# Altium PCB Motor_Driver_Model_D203.PcbDoc (part 1 of 4)
Units mm, origin at the board's own origin, x right, y up, seen from the top; angles counter-clockwise.
Board outline 50 x 35 mm, 4 copper layers (1-SIG-TOP, 2-SIG-GND, 3-SIG-PWR, 4-SIG-BOT), stack 0.96 mm thick; 141 components, 74 nets, 356 pads, 1049 vias.
Unrouted connection lines stored in the file: 1.
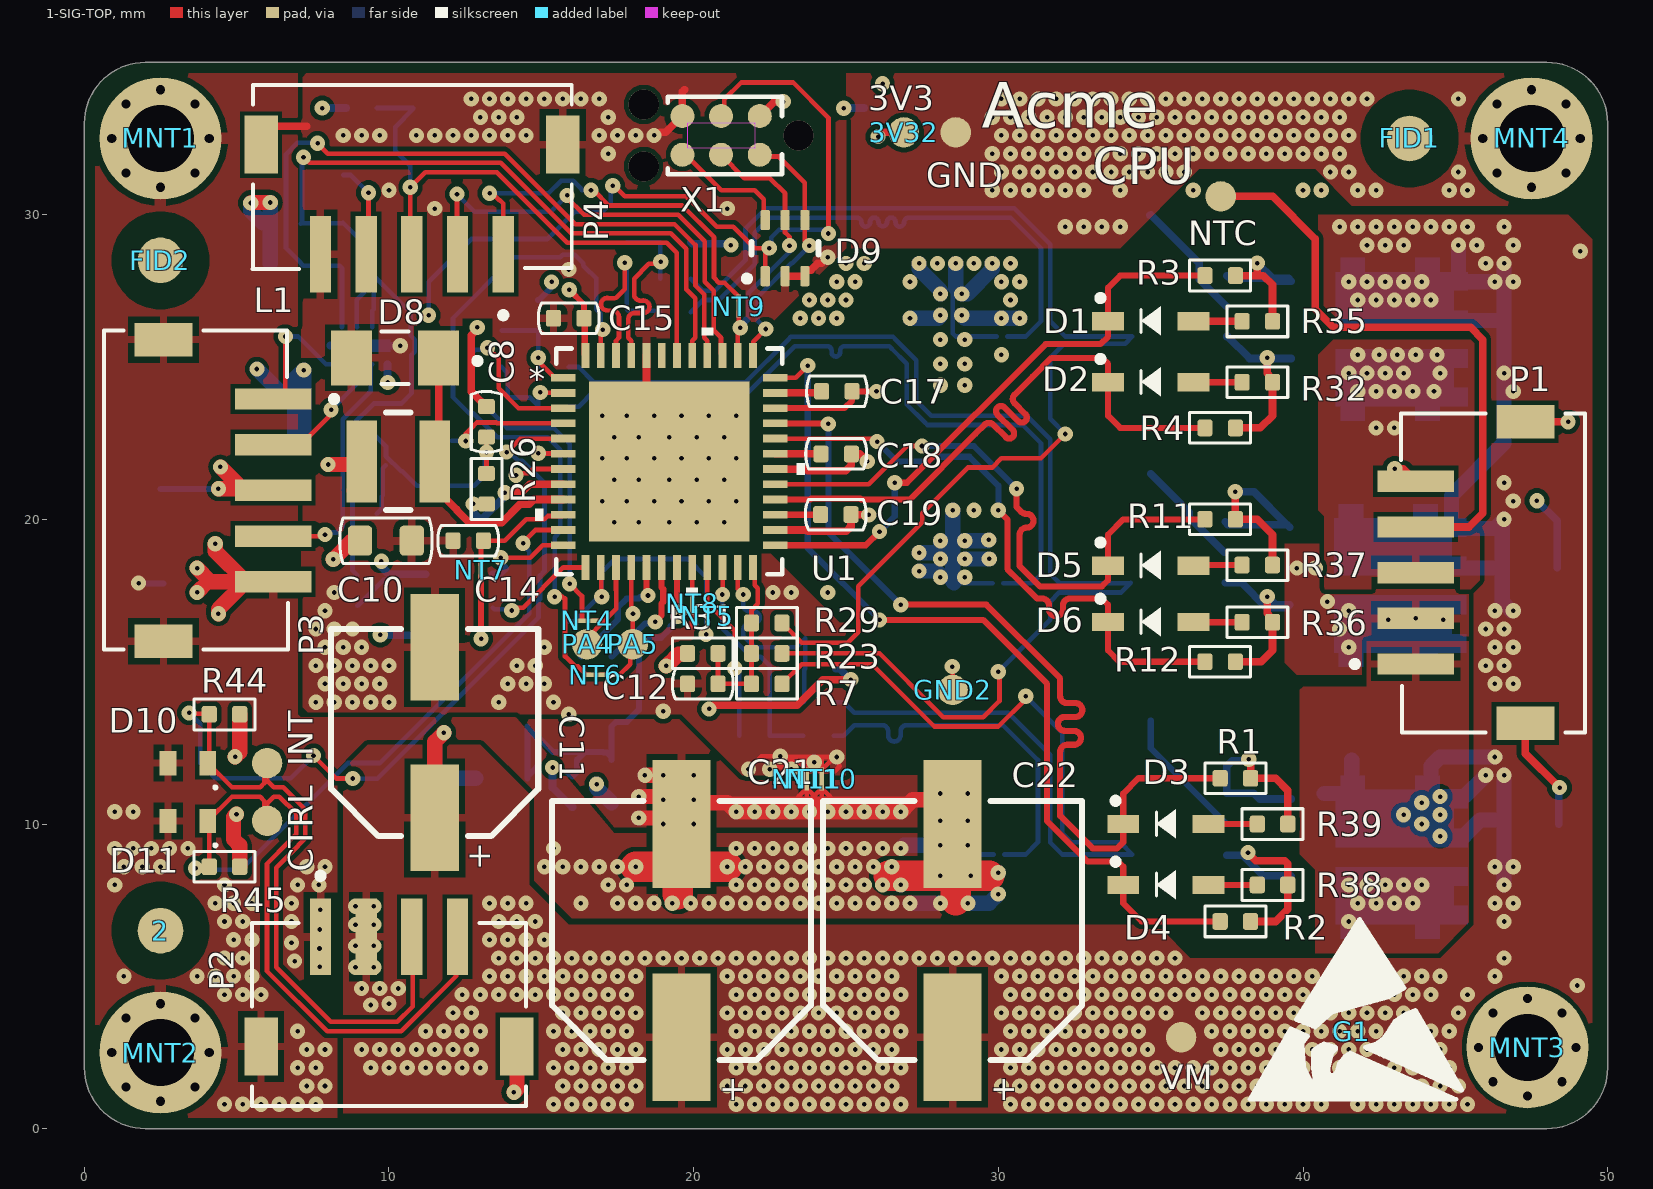
[diagram p0: 1-SIG-TOP view]
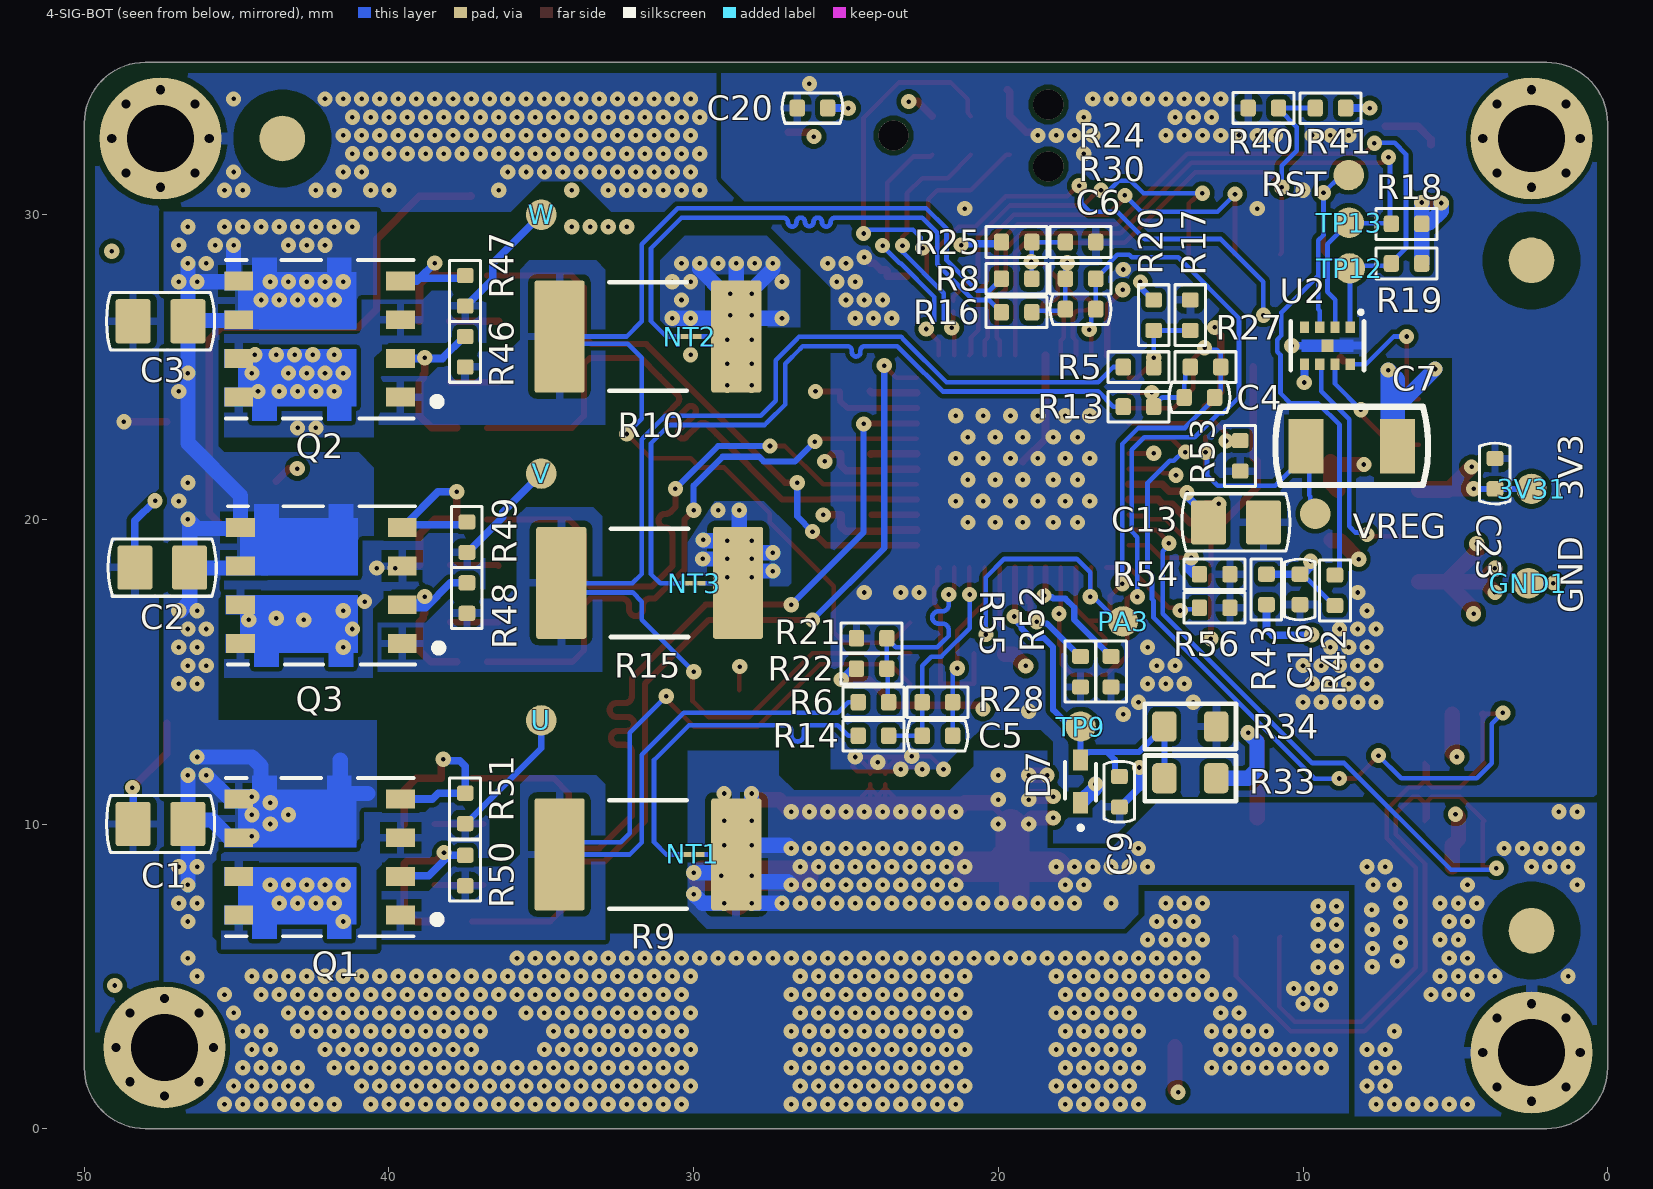
[diagram p1: 4-SIG-BOT view, seen from below]
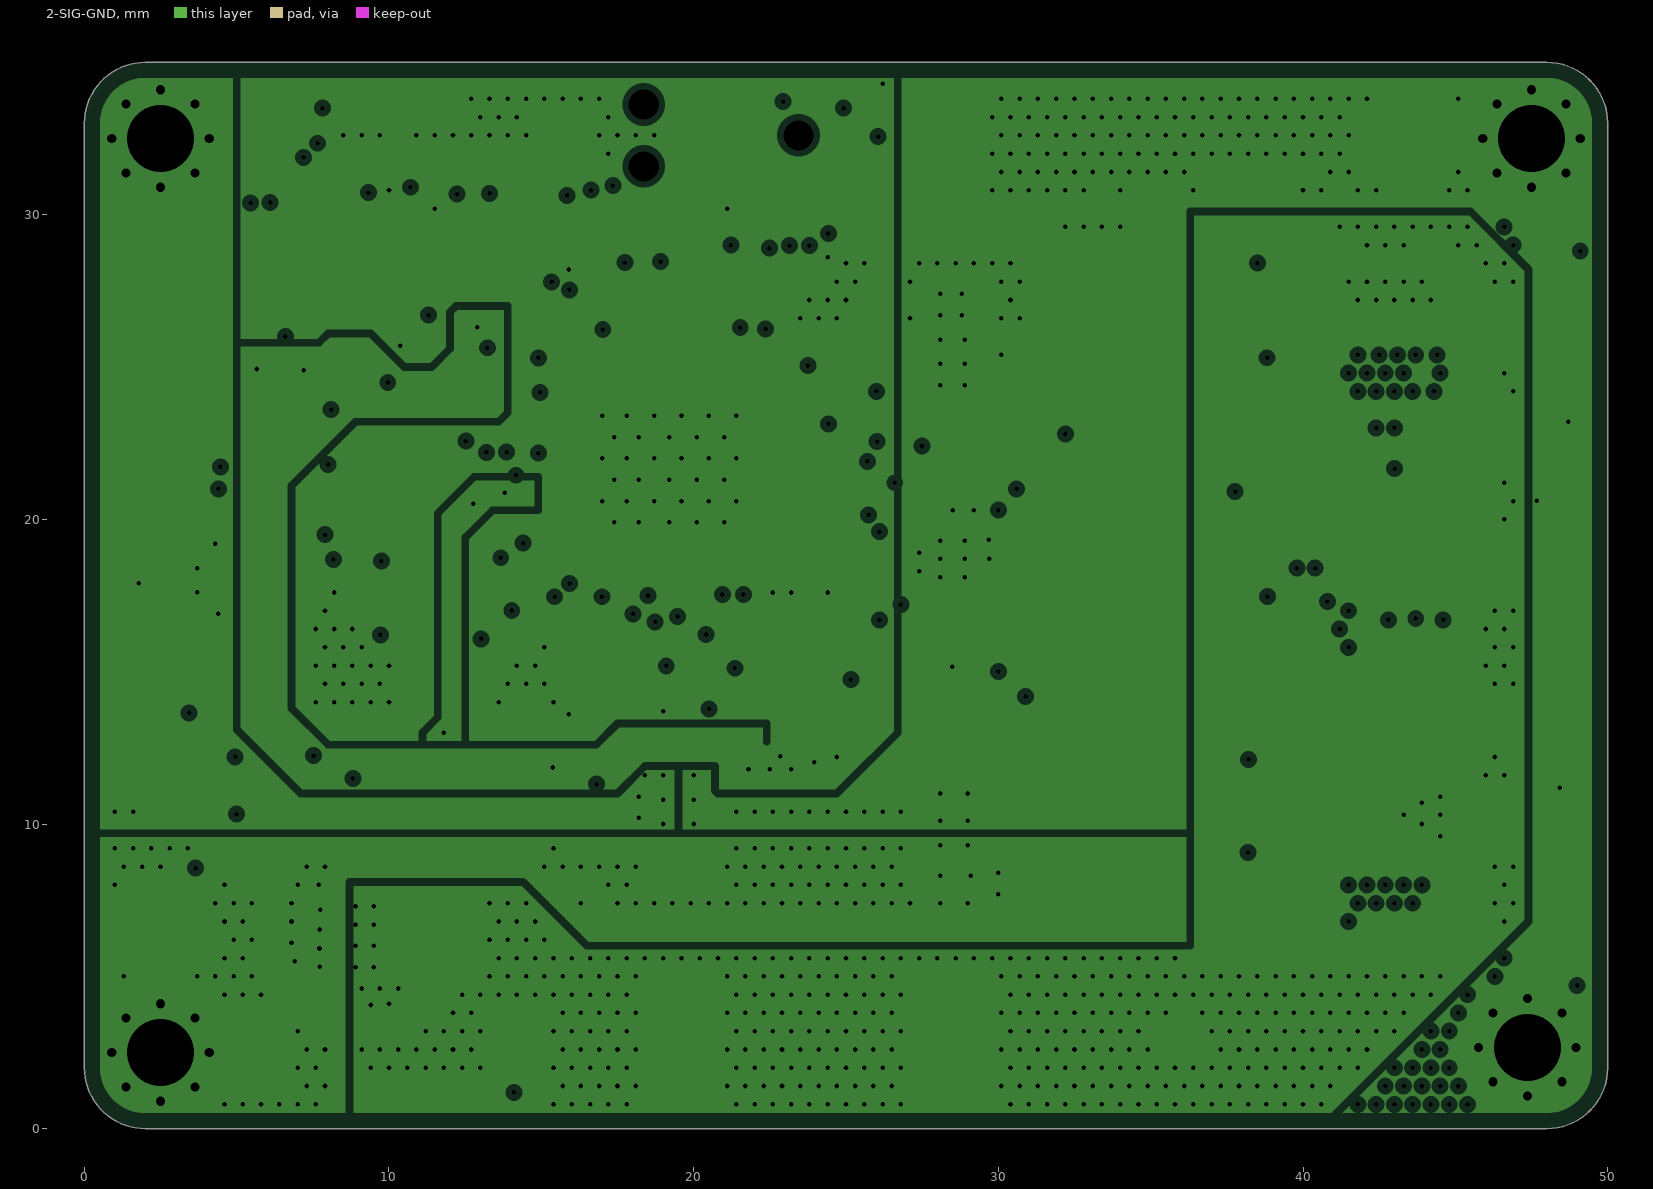
[diagram p2: 2-SIG-GND, clearances drawn from the general rule]
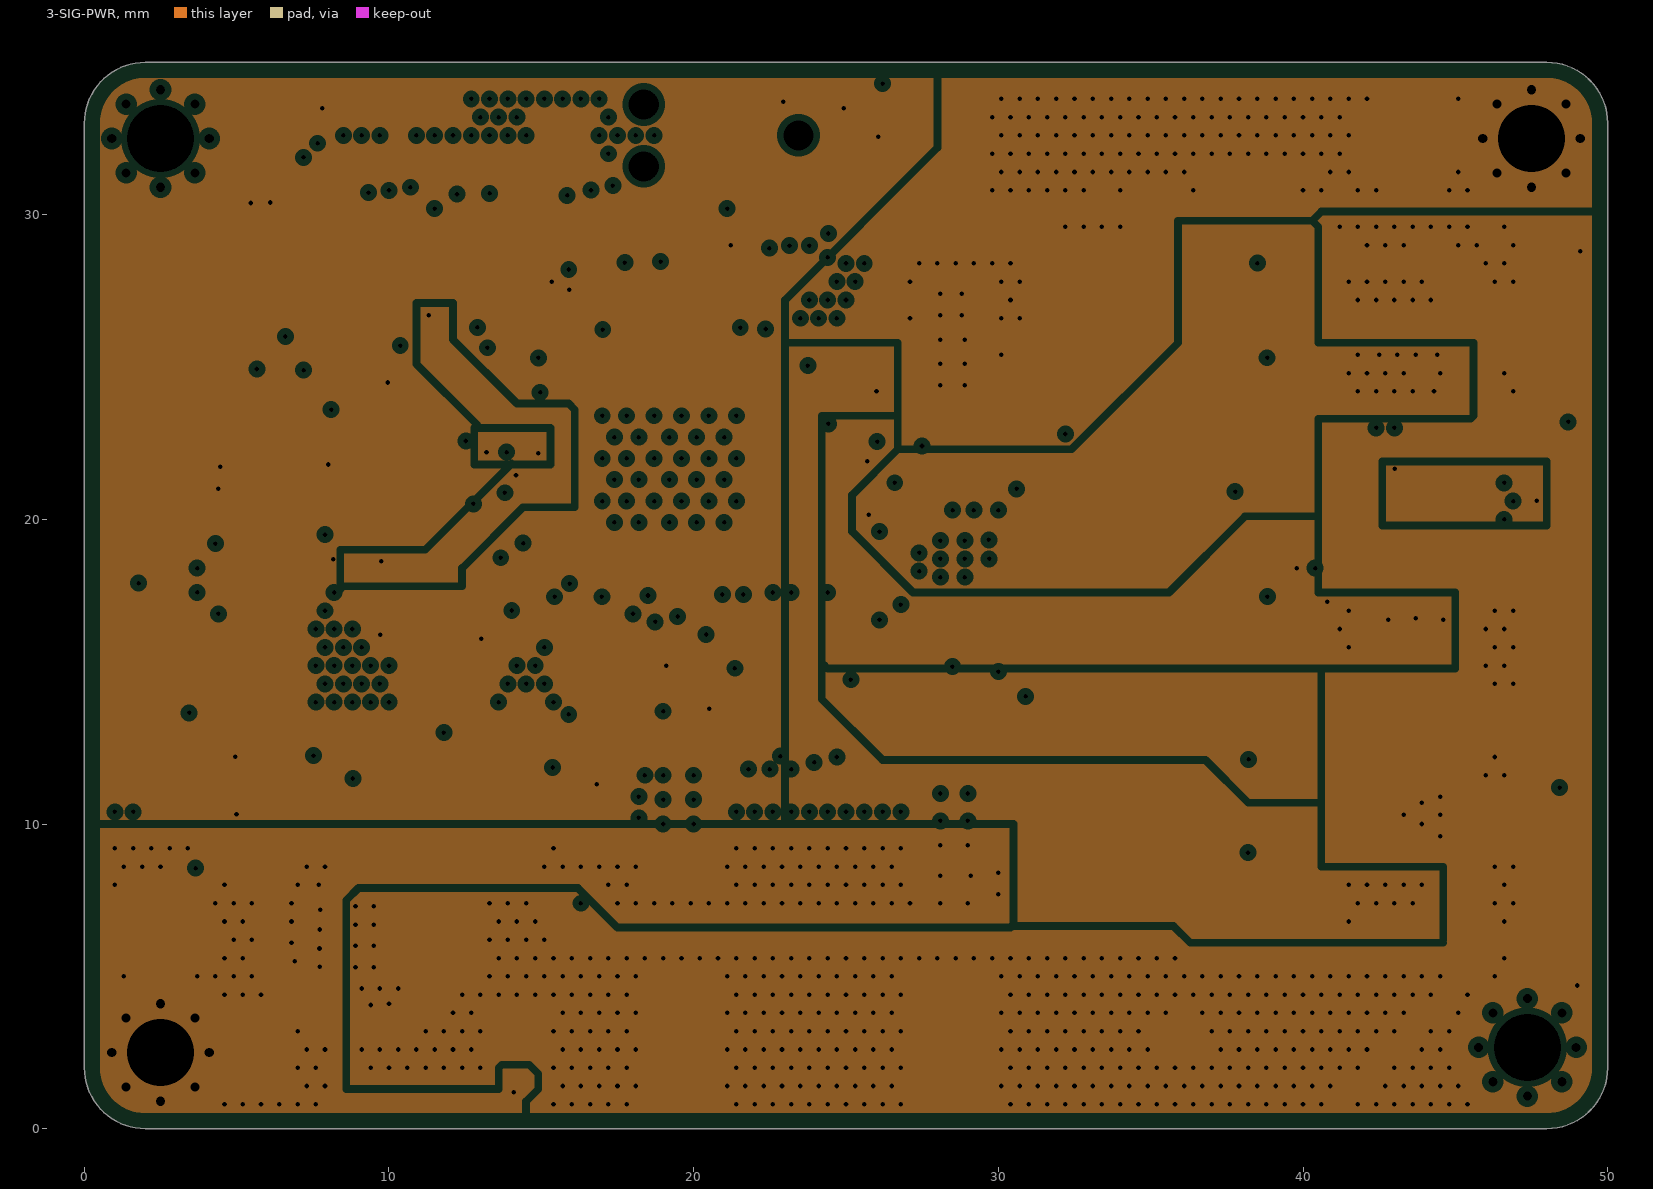
[diagram p3: 3-SIG-PWR, clearances drawn from the general rule]
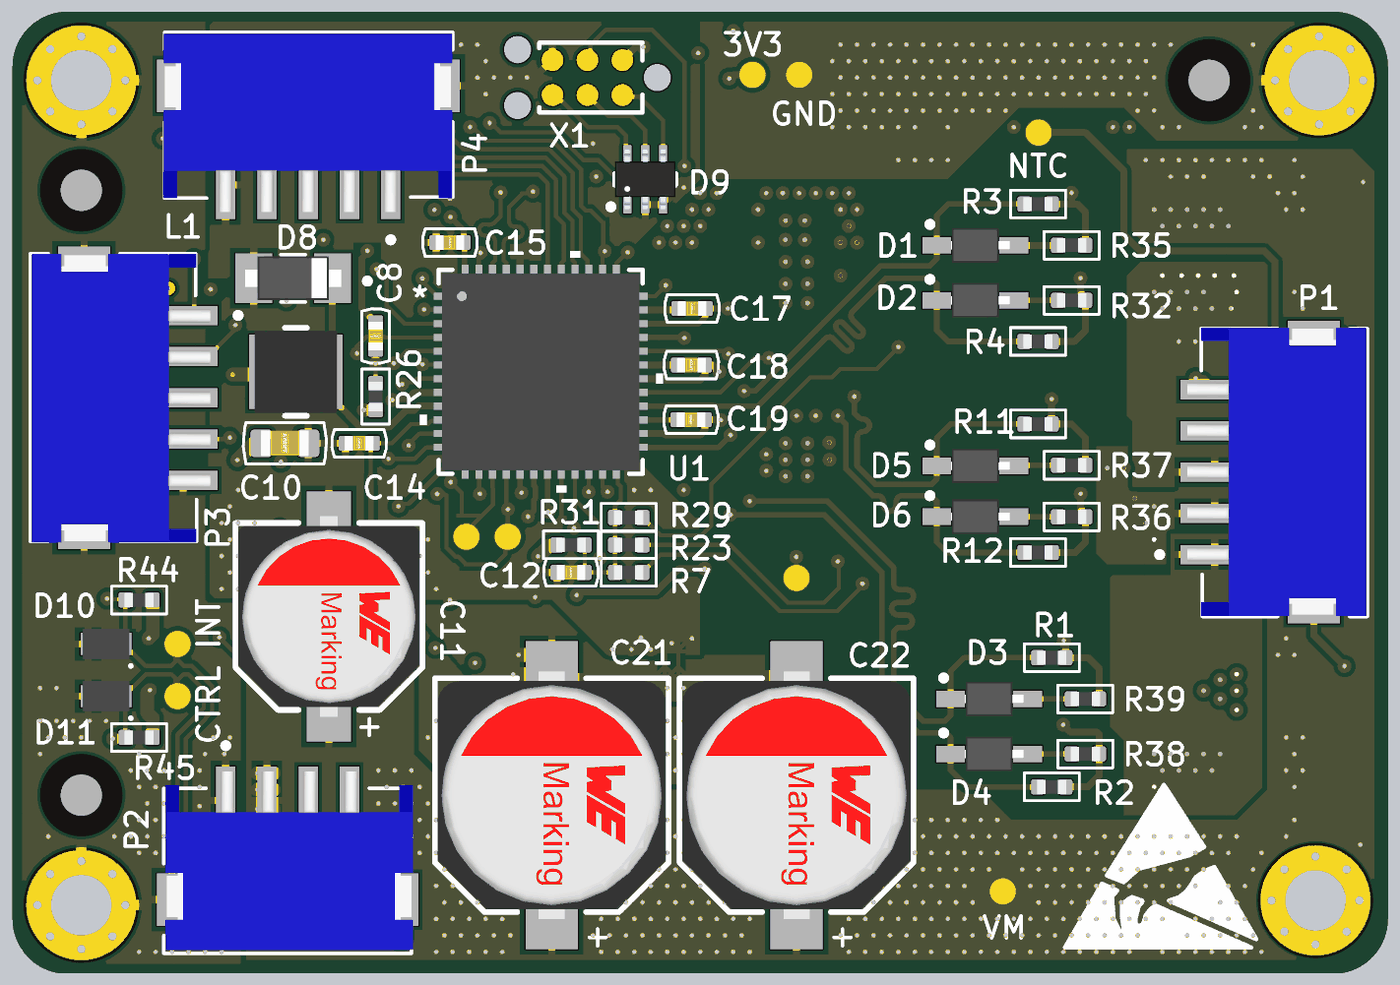
[diagram p6: 3D render of the assembled board from above, using the file's embedded part models]
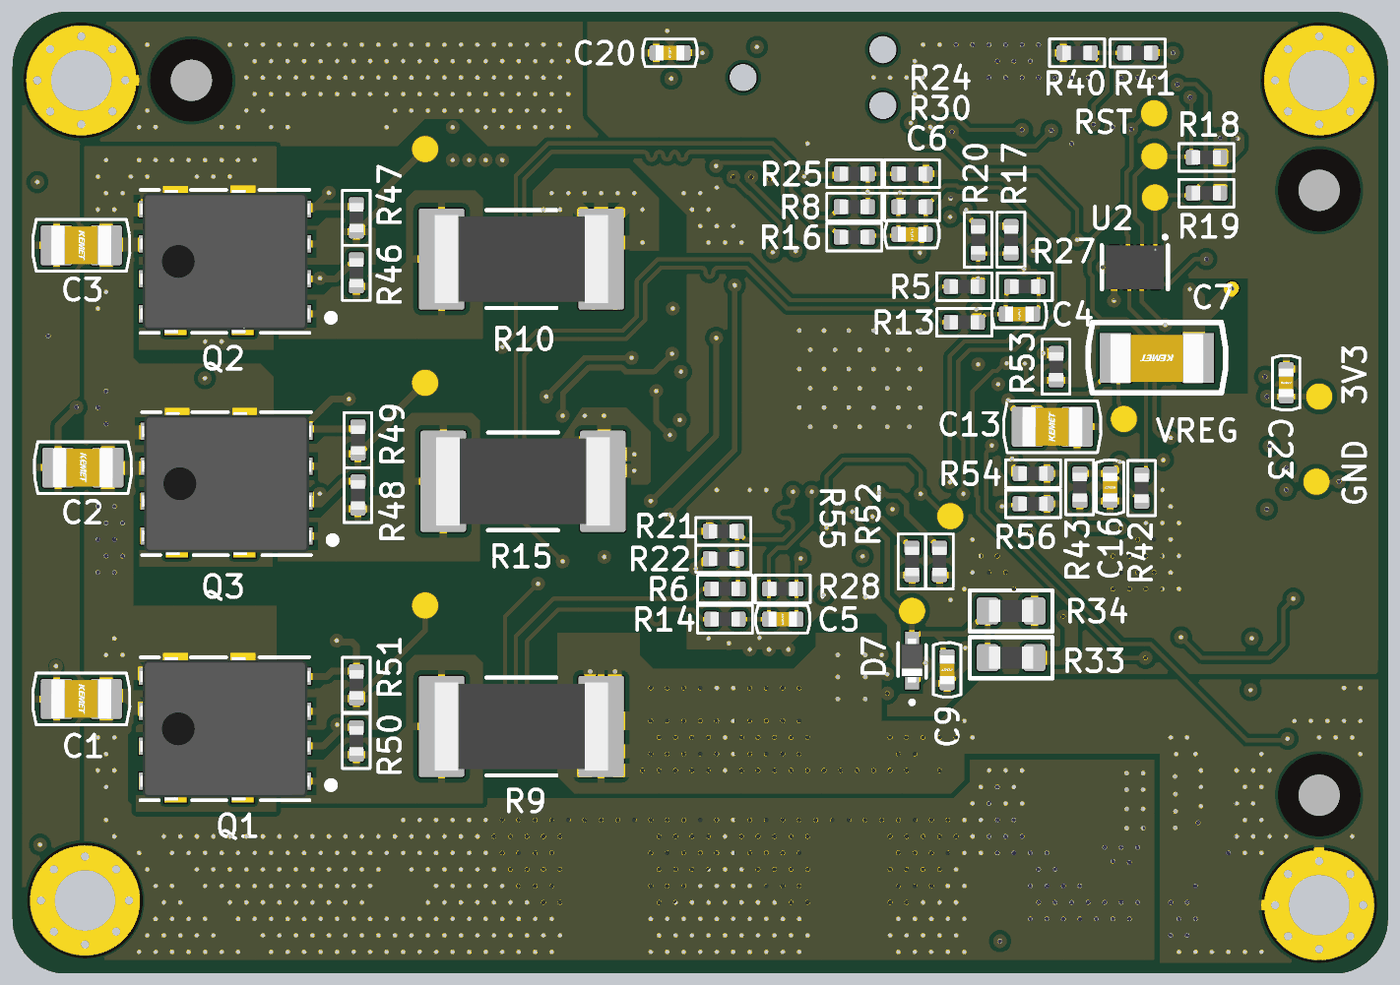
[diagram p7: 3D render of the assembled board from below, using the file's embedded part models]

## Layer stack, top to bottom
Top Solder: solder mask 0.01, Solder Resist, Dk 3.5
1-SIG-TOP: signal copper 0.035
Dielectric 1: prepreg 0.11, FR-4, Dk 4.29
2-SIG-GND: plane copper 0.035, net (Multiple Nets)
Dielectric 3: core 0.6, Dk 4.2
3-SIG-PWR: plane copper 0.035, net (Multiple Nets)
Dielectric 2: prepreg 0.11, Dk 4.29
4-SIG-BOT: signal copper 0.035
Bottom Solder: solder mask 0.01, Solder Resist, Dk 3.5

## Board outline
0,2 0,33 cw(c2,33) 2,35 48,35 cw(c48,33) 50,33 50,2 cw(c48,2) 48,0 2,0 cw(c2,2)

## Design rules (kind name [scope] priority, off if disabled: settings)
BoardOutlineClearance BoardOutlineClearance_LayerStack [WithinRoom('PCB_Stackup')] p1: gap=0 ignorepadtopadclearanceinfootprint=FALSE
BoardOutlineClearance BoardOutlineClearance_LayerNames [WithinRoom('Layer_Names')] p2: gap=0 ignorepadtopadclearanceinfootprint=FALSE
BoardOutlineClearance BoardOutlineClearance_Overlays [OnBottomSilkscreen or OnTopSilkscreen] p3: gap=0 ignorepadtopadclearanceinfootprint=FALSE
BoardOutlineClearance [All] p4: gap=0.35 ignorepadtopadclearanceinfootprint=FALSE
Clearance Clearance_InnerLayers [OnLayer('2-GND') or OnLayer('3-GND-PWR')] p1: gap=0.152 ignorepadtopadclearanceinfootprint=TRUE except(0.203: Arc-SMDPad Arc-THPad Arc-Via Arc-Hole Track-SMDPad Track-THPad Track-Via Track-Hole THPad-THPad THPad-Via THPad-Fill THPad-Poly THPad-Region THPad-Hole Via-Via Via-Fill Via-Poly Via-Region Via-Hole Fill-Hole Poly-Hole Region-Hole)
Clearance [All] p2: gap=0.152 ignorepadtopadclearanceinfootprint=FALSE
ComponentClearance ComponentClearance_NetTie [HasFootprint('Net Tie 6x30mil') vs not HasFootprint('Net Tie 6x30mil')] p1: gap=0 collisioncheckmode=3 verticalgap=0 showdistances=FALSE
ComponentClearance ComponentClearance_PCB_Stackup [WithinRoom('PCB_Stackup')] p2: gap=0 collisioncheckmode=3 verticalgap=0 showdistances=FALSE
ComponentClearance ComponentClearance_PCB_Features [InComponentClass('PCB_FEATURE')] p3: gap=0 collisioncheckmode=3 verticalgap=0 showdistances=FALSE
ComponentClearance ComponentClearance_Fiducials [InComponentClass('PCB_FEATURE') vs HasFootprint('CONN_S4B-ZR(LF)(SN)') or HasFootprint('CONN_S5B-ZR(LF)(SN)')] p4: gap=0 collisioncheckmode=3 verticalgap=0 showdistances=FALSE
ComponentClearance ComponentClearance_Top [OnTopLayer vs OnTopLayer] p5: gap=0.305 collisioncheckmode=3 verticalgap=1.016 showdistances=FALSE
ComponentClearance ComponentClearance_Bot [OnBottomLayer vs OnBottomLayer] p6: gap=0.305 collisioncheckmode=3 verticalgap=1.016 showdistances=FALSE
DiffPairsRouting DiffPair_DiffPairsRouting [InDifferentialPair ('SENSE1')] p1: maxlimit=0.254 minlimit=0.152 mostfreqgap=0.254 toplayer_minwidth=0.152 toplayer_maxwidth=0.254 toplayer_prefwidth=0.2 bottomlayer_minwidth=0.152 bottomlayer_maxwidth=0.254 bottomlayer_prefwidth=0.2 maxuncoupledlength=12.7
DiffPairsRouting [All] p2: maxlimit=0.152 minlimit=0.127 mostfreqgap=0.152 toplayer_minwidth=0.152 toplayer_maxwidth=0.254 toplayer_prefwidth=0.2 bottomlayer_minwidth=0.152 bottomlayer_maxwidth=0.254 bottomlayer_prefwidth=0.2 maxuncoupledlength=12.7
HoleToHoleClearance [All] p1: gap=0.254 allowstackedmicrovias=FALSE
MatchedLengths DiffPair_MatchedLengths [InDifferentialPair ('SENSE1')] p1: tolerance=25.4 checknetsindiffpair=FALSE checkdiffpairvsdiffpair=TRUE checkxsignals=TRUE checkothers=TRUE
MinimumAnnularRing MinimumAnnularRing_Via_Int [IsVia and not (OnTopLayer or OnBottomLayer)] p1: minimumring=0
MinimumAnnularRing [All] p2: minimumring=0.152
MinimumSolderMaskSliver [All] p1: minsoldermaskwidth=0.076
PlaneClearance [All] p1: clearance=0.203
PlaneConnect PlaneConnect_Via [IsVia] p1: planeconnectstyle=Direct reliefexpansion=0.508 reliefentries=4 reliefconductorwidth=0.254 reliefairgap=0.254
PlaneConnect PlaneConnect_HeatTrap [All] p2: pad.planeconnectstyle=Relief pad.reliefexpansion=0.152 pad.reliefentries=4 pad.reliefconductorwidth=0.152 pad.reliefairgap=0.152 via.planeconnectstyle=Direct via.reliefexpansion=0.203 via.reliefentries=4 via.reliefconductorwidth=0.254 via.reliefairgap=0.254
PolygonConnect PolygonConnect_Via [IsVia] p1: connectstyle=Direct reliefconductorwidth=0.254 reliefentries=4 polygonreliefangle="90 Angle" airgapwidth=0.254
PolygonConnect PolygonConnect_TestPoints [InComponentClass('TestPoint')] p2: connectstyle=Direct reliefconductorwidth=0.254 reliefentries=4 polygonreliefangle="90 Angle" airgapwidth=0.254
PolygonConnect PolygonConnect_ThermPads [HasFootprintPad('DFN65P100X40-4N','5') or HasFootprintPad('WSON-6 065','7') or HasFootprintPad('SOT908-1','9')] p3: connectstyle=Direct reliefconductorwidth=0.254 reliefentries=4 polygonreliefangle="90 Angle" airgapwidth=0.254
PolygonConnect [All] p4: thpad.connectstyle=Relief thpad.reliefconductorwidth=0.381 thpad.reliefentries=4 thpad.polygonreliefangle="90 Angle" thpad.airgapwidth=0.203 smdpad.connectstyle=Relief smdpad.reliefconductorwidth=0.254 smdpad.reliefentries=4 smdpad.polygonreliefangle="90 Angle" smdpad.airgapwidth=0.203 via.connectstyle=Relief via.reliefconductorwidth=0.254 via.reliefentries=4 via.polygonreliefangle="90 Angle" via.airgapwidth=0.254
RoomDefinition U_STSPIN32F0A-bldc-driver [InComponentClass('U_STSPIN32F0A-bldc-driver')] p1: confinementstyle=ConfineIn formatcopy=TRUE lockcomponents=FALSE outline 69.259,64.002 98.259,64.002 98.259,-5.998 69.259,-5.998
RoutingVias [All] p1: holewidth=0.15 width=0.5 viastyle="Through Hole" minholewidth=0.15 minwidth=0.5 maxholewidth=0.5 maxwidth=0.7
SilkToSilkClearance [All] p1: silktosilkclearance=0.025
SilkToSolderMaskClearance [IsPad] p1: minsilkscreentomaskgap=0.102 clearancetoexposedcopper=FALSE
SolderMaskExpansion [All] p1: expansion=0.051 istentingtop=FALSE
Width [All] p1: maxlimit=5.08 minlimit=0.152 preferedwidth=1
22 further rules are at their usual default settings.

## Classes and differential pairs
component class USB_SW: R26 R41 R44 R45 R52 R53 R54 R55 R56
component class U_TC2030-NL_TagConnect_6-pin: C20 D9 X1
component class U_STSPIN32F0A-bldc-driver: C7 C8 C9 C10 C11 C13 C14 C15 C16 C17 C18 C19 D7 D8 L1 NT7 NT8 NT9 P4 R18 R19 R26 R33 R34 R40 R41 R42 R43 R44 R45 R52 R53 R54 R55 R56 U1
component class U_input-port-con: C21 C22 C23 D10 D11 NT10 NT11 P2 P3 U2
component class U_H-Bridge-control&sense: C1 C2 C3 C4 C5 C6 C12 D1 D2 D3 D4 D5 D6 NT1 NT2 NT3 NT4 NT5 NT6 P1 Q1 Q2 Q3 R1 R2 R3 R4 R5 R6 R7 R8 R9 R10 R11 R12 R13 R14 R15 R16 R17 R20 R21 R22 R23 R24 R25 R27 R28 R29 R30 R31 R32 R35 R36 R37 R38 R39 R46 R47 R48 R49 R50 R51
component class TP: 3V31 3V32 CTRL GND GND1 GND2 INT NTC PA3 PA4 PA5 RST TP9 TP12 TP13 U V VM VREG W
component class TestPoint: 3V31 3V32 CTRL GND GND1 GND2 INT NTC PA3 PA4 PA5 RST TP9 TP12 TP13 U V VM VREG W
component class TCPP: Q1 Q2 Q3
component class STM32G473CETx: NT1 NT2 NT3 NT4 NT5 NT6 NT7 NT8 NT9 NT10 NT11 R32 R35 R36 R37 R38 R39 R46 R47 R48 R49 R50 R51
component class PCB_FEATURE: 2 FID1 FID2 G1 Logo1
component class I2C_SW: R18 R19
differential pair SENSE3: +SENSE3_P -SENSE3_N
differential pair SENSE2: +SENSE2_P -SENSE2_N
differential pair SENSE1: +SENSE1_P -SENSE1_N

## Components (designator, comment, footprint, x,y, rotation, side; value= is the part's Value field where it differs from the comment)
2 "N/A" Fiducial 2.5,6.5 r90 top (schematic designator FID3)
3V31 "Test Point Pad" Testpoint#1 2.5,21 r90 bottom (schematic designator TP15)
3V32 "Test Point Pad" Testpoint#1 26.9,32.7 r0 top (schematic designator TP2)
C1 "CAP CER 220nF 10V X7R 0805" C0805 47.5,10 r180 bottom (schematic designator C5)
C2 "CAP CER 220nF 10V X7R 0805" C0805 47.443,18.415 r180 bottom (schematic designator C7)
C3 "CAP CER 220nF 10V X7R 0805" C0805 47.5,26.5 r180 bottom (schematic designator C6)
C4 "C 100pF 50V C0G, NP0 0402" C0402 13.4,24 r180 bottom (schematic designator C2)
C5 "C 100pF 50V C0G, NP0 0402" C0402 22,12.9 r180 bottom (schematic designator C1)
C6 "C 100pF 50V C0G, NP0 0402" C0402 17.3,26.9 r180 bottom (schematic designator C3)
C7 "CAP CER 10UF 25V X7R 1206" C1206 8.4,22.4 r0 bottom (schematic designator C2)
C8 "CAP CER 0.1UF 50V X7R 0402" C0402 13.2,23.2 r270 top (schematic designator C3)
C9 "CAP CER 4.7nF 50V X7R 0402" C0402 16.027,11.059 r90 bottom (schematic designator C11)
C10 "CAP CER 47UF 6.3V X5R 0603" C0603 9.9,19.3 r180 top (schematic designator C8)
C11 "22uF, 63V" WCAP-ASLL_D6.3H7.7 11.5,13 r270 top (schematic designator C5)
C12 "CAP CER 1000PF 50V X7R 0402" C0402 20.3,14.6 r0 top (schematic designator C4)
C13 "CAP CER 220nF 100V X7R 0805" C0805 12.2,19.9 r0 bottom (schematic designator C4)
C14 "CAP CER 0.1UF 50V X7R 0402" C0402 12.6,19.3 r0 top (schematic designator C6)
C15 "CAP CER 0.1UF 50V X7R 0402" C0402 15.9,26.6 r0 top (schematic designator C1)
C16 "CAP CER 0.1UF 50V X7R 0402" C0402 10.1,17.7 r90 bottom (schematic designator C12)
C17 "CAP CER 0.1UF 50V X7R 0402" C0402 24.7,24.2 r0 top (schematic designator C7)
C18 "CAP CER 0.1UF 50V X7R 0402" C0402 24.678,22.146 r180 top (schematic designator C9)
C19 "CAP CER 0.1UF 50V X7R 0402" C0402 24.664,20.156 r180 top (schematic designator C10)
C20 "CAP CER 0.1UF 50V X7R 0402" C0402 26.1,33.5 r180 bottom (schematic designator C8)
C21 "CAP ALUM 220 UF 20% 35 V SMD" WCAP-ASLI_D8H10.5 19.6,6.5 r270 top (schematic designator C9)
C22 "CAP ALUM 220 UF 20% 35 V SMD" WCAP-ASLI_D8H10.5 28.5,6.5 r270 top (schematic designator C10)
C23 "CAP CER 1UF 6.3V X5R 0402" C0402 3.7,21.5 r270 bottom (schematic designator C11)
CTRL "Test Point Pad" Testpoint#1 6,10.1 r180 top (schematic designator TP18)
D1 "1N4148WSTR" SODFL2512X100N 35,26.5 r0 top (schematic designator D3)
D2 "1N4148WSTR" SODFL2512X100N 35,24.5 r0 top (schematic designator D4)
D3 "1N4148WSTR" SODFL2512X100N 35.5,10 r0 top (schematic designator D5)
D4 "1N4148WSTR" SODFL2512X100N 35.5,8 r0 top (schematic designator D6)
D5 "1N4148WSTR" SODFL2512X100N 35,18.477 r0 top (schematic designator D1)
D6 "1N4148WSTR" SODFL2512X100N 35,16.632 r0 top (schematic designator D2)
D7 "BAT30KFILM" SOD523 17.3,11.4 r270 bottom (schematic designator D2)
D8 "STPS1L60ZF" DIO_STPS1L60ZF 10.2,25.3 r180 top (schematic designator D1)
D9 "SMF05CT1G" SOT363_SOP65P210X265-6N 23,28.9 r90 top (schematic designator D7)
D10 "ESDA7P120-1U1M" ST_QFN_1610 3.4,12 r180 top (schematic designator D9)
D11 "ESDA7P120-1U1M" ST_QFN_1610 3.4,10.1 r180 top (schematic designator D8)
FID1 "N/A" Fiducial 43.5,32.5 r0 top
FID2 "N/A" Fiducial 2.5,28.5 r90 top
G1 "Logo_ESD" Logo_ESD 41.6,3.2 r0 top
GND "Test Point Pad" Testpoint#1 28.6,32.7 r90 top (schematic designator TP7)
GND1 "Test Point Pad" Testpoint#1 2.6,17.9 r90 bottom (schematic designator TP5)
GND2 "Test Point Pad" Testpoint#1 28.5,14.4 r90 top (schematic designator TP9)
INT "Test Point Pad" Testpoint#1 6,12 r180 top (schematic designator TP19)
L1 "22uH, 0.6A" WE-LQS_3015 10.3,21.9 r0 top
Logo1 "Logo ACME_CPU" LOGO_ACME_CPU -8,4 r180 bottom (schematic designator Logo)
MNT1 "MountHole M2. Nothing to buy or mount" MountHole_M2 2.5,32.5 r0 top
MNT2 "MountHole M2. Nothing to buy or mount" MountHole_M2 2.5,2.5 r0 top
MNT3 "MountHole M2. Nothing to buy or mount" MountHole_M2 47.365,2.67 r0 top
MNT4 "MountHole M2. Nothing to buy or mount" MountHole_M2 47.5,32.5 r0 top
NT1 "Net Tie" "Net Tie 6x30mil" 30.022,9 r180 bottom net-tie (schematic designator NT4)
NT2 "Net Tie" "Net Tie 6x30mil" 30.122,26 r180 bottom net-tie (schematic designator NT6)
NT3 "Net Tie" "Net Tie 6x30mil" 29.988,17.9 r180 bottom net-tie (schematic designator NT5)
NT4 "Net Tie" "Net Tie 6x30mil" 16.511,16.671 r0 top net-tie (schematic designator NT2)
NT5 "Net Tie" "Net Tie 6x30mil" 20.448,16.818 r270 top net-tie (schematic designator NT1)
NT6 "Net Tie" "Net Tie 6x30mil" 16.778,14.9 r0 top net-tie (schematic designator NT3)
NT7 "Net Tie" "Net Tie 6x30mil" 13.02,18.322 r90 top net-tie (schematic designator NT1)
NT8 "Net Tie" "Net Tie 6x30mil" 19.958,17.254 r90 top net-tie (schematic designator NT3)
NT9 "Net Tie" "Net Tie 6x30mil" 21.474,26.998 r90 top net-tie (schematic designator NT2)
NT10 "Net Tie" "Net Tie 6x30mil" 24.2,11.478 r270 top net-tie (schematic designator NT7)
NT11 "Net Tie" "Net Tie 6x30mil" 23.711,11.475 r270 top net-tie
NTC "Test Point Pad" Testpoint#1 37.3,30.6 r90 top (schematic designator TP6)
P1 "I2C" JST_S5B-ZR-SM4A-TF(LF)(SN) 45.5,17.5 r90 top
P2 "PWR_IN" JST_S4B-ZR-SM4A-TF(LF)(SN) 10,4.5 r0 top (schematic designator P401)
P3 "I2C" JST_S5B-ZR-SM4A-TF(LF)(SN) 4.4,21.7 r270 top (schematic designator P402)
P4 "PROG" JST_S5B-ZR-SM4A-TF(LF)(SN) 11.5,30.5 r180 top (schematic designator P1)
PA3 "Test Point Pad" Testpoint#2 15.808,16.648 r90 bottom (schematic designator TP11)
PA4 "Test Point Pad" Testpoint#2 16.6,15.9 r90 top (schematic designator TP10)
PA5 "Test Point Pad" Testpoint#1 18,15.9 r90 top (schematic designator TP16)
Q1 "STL36DN6F7" POWERFLAT-5x6 42.275,8.915 r0 bottom
Q2 "STL36DN6F7" POWERFLAT-5x6 42.275,25.915 r0 bottom (schematic designator Q3)
Q3 "STL36DN6F7" POWERFLAT-5x6 42.218,17.83 r0 bottom (schematic designator Q2)
R1 "RES SMD 62 OHM 1% 1/10W 0402" R0402 37.78,11.5 r180 top (schematic designator R21)
R2 "RES SMD 62 OHM 1% 1/10W 0402" R0402 37.78,6.8 r180 top (schematic designator R22)
R3 "RES SMD 62 OHM 1% 1/10W 0402" R0402 37.28,28 r180 top (schematic designator R24)
R4 "RES SMD 62 OHM 1% 1/10W 0402" R0402 37.28,23 r180 top (schematic designator R25)
R5 "RES SMD 1.78K OHM 1% 1/10W 0402" R0402 15.4,25 r180 bottom (schematic designator R2)
R6 "RES SMD 1.78K OHM 1% 1/10W 0402" R0402 24.1,14 r180 bottom (schematic designator R1)
R7 "RES SMD 2.2 KOHM 1% 1/10W 0402" R0402 22.4,14.6 r180 top (schematic designator R4)
R8 "RES SMD 1.78K OHM 1% 1/10W 0402" R0402 19.4,27.9 r180 bottom (schematic designator R3)
R9 "RES SMD 0.04 OHM 1% 2W 2512" R2512 31.5,9 r0 bottom (schematic designator R32)
R10 "RES SMD 0.04 OHM 1% 2W 2512" R2512 31.5,26 r0 bottom (schematic designator R34)
R11 "RES SMD 62 OHM 1% 1/10W 0402" R0402 37.28,20 r180 top (schematic designator R20)
R12 "RES SMD 62 OHM 1% 1/10W 0402" R0402 37.28,15.325 r180 top (schematic designator R23)
R13 "RES SMD 1.78K OHM 1% 1/10W 0402" R0402 15.4,23.7 r180 bottom (schematic designator R6)
R14 "RES SMD 1.78K OHM 1% 1/10W 0402" R0402 24.1,12.9 r180 bottom (schematic designator R5)
R15 "RES SMD 0.04 OHM 1% 2W 2512" R2512 31.443,17.915 r0 bottom (schematic designator R33)
R16 "RES SMD 1.78K OHM 1% 1/10W 0402" R0402 19.4,26.8 r180 bottom (schematic designator R7)
R17 "RES SMD 27.4K OHM 1% 1/10W 0402" R0402 13.7,26.7 r270 bottom (schematic designator R11)
R18 "RES SMD 4.75K OHM 1% 1/16W 0402" R0402 6.6,29.7 r180 bottom (schematic designator R2)
R19 "RES SMD 4.75K OHM 1% 1/16W 0402" R0402 6.6,28.4 r180 bottom (schematic designator R3)
R20 "RES SMD 27.4K OHM 1% 1/10W 0402" R0402 14.9,26.7 r90 bottom (schematic designator R10)
R21 "RES SMD 27.4K OHM 1% 1/10W 0402" R0402 24.159,16.098 r180 bottom (schematic designator R9)
R22 "RES SMD 27.4K OHM 1% 1/10W 0402" R0402 24.159,15.098 r0 bottom (schematic designator R8)
R23 "RES SMD 2.2 KOHM 1% 1/10W 0402" R0402 22.4,15.6 r180 top (schematic designator R12)
R24 "RES SMD 27.4K OHM 1% 1/10W 0402" R0402 17.3,29.1 r0 bottom (schematic designator R14)
R25 "RES SMD 27.4K OHM 1% 1/10W 0402" R0402 19.4,29.1 r0 bottom (schematic designator R13)
R26 "*DNP*" R0402 13.2,21 r90 top (schematic designator R1)
R27 "RES SMD 13.7K OHM 1% 1/10W 0402" R0402 13.2,25 r180 bottom (schematic designator R16)
R28 "RES SMD 13.7K OHM 1% 1/10W 0402" R0402 22,14 r180 bottom (schematic designator R15)
R29 "RES SMD 2.2 KOHM 1% 1/10W 0402" R0402 22.4,16.6 r180 top (schematic designator R18)
R30 "RES SMD 13.7K OHM 1% 1/10W 0402" R0402 17.3,27.9 r180 bottom (schematic designator R17)
R31 "RES SMD 24.3 KOHM 1% 1/10W 0402" R0402 20.3,15.6 r180 top (schematic designator R19)
R32 "RES SMD 10 OHM 1% 1/16W 0402" R0402 38.5,24.5 r0 top (schematic designator R31)
R33 "RES SMD 169 KOHM 1% 1/8W 0603" R0603 13.7,11.5 r180 bottom (schematic designator R6)
R34 "RES SMD 9.31 KOHM 1% 1/8W 0603" R0603 13.7,13.2 r0 bottom (schematic designator R7)
R35 "RES SMD 10 OHM 1% 1/16W 0402" R0402 38.5,26.5 r0 top (schematic designator R30)
R36 "RES SMD 10 OHM 1% 1/16W 0402" R0402 38.5,16.623 r0 top (schematic designator R29)
R37 "RES SMD 10 OHM 1% 1/16W 0402" R0402 38.5,18.5 r0 top (schematic designator R28)
R38 "RES SMD 10 OHM 1% 1/16W 0402" R0402 39,8 r0 top (schematic designator R27)
R39 "RES SMD 10 OHM 1% 1/16W 0402" R0402 39,10 r0 top (schematic designator R26)
R40 "RES SMD 10K OHM 1% 1/16W 0402" R0402 11.3,33.5 r0 bottom (schematic designator R4)
R41 "*DNP*" R0402 9.1,33.5 r180 bottom (schematic designator R5)
R42 "RES SMD 100 OHM 1% 1/16W 0402" R0402 8.954,17.669 r90 bottom (schematic designator R9)
R43 "RES SMD 39K OHM 1% 1/10W 0402" R0402 11.2,17.7 r270 bottom (schematic designator R8)
R44 "*DNP*" R0402 4.6,13.6 r0 top (schematic designator R3)
R45 "*DNP*" R0402 4.6,8.6 r0 top (schematic designator R2)
R46 "RES SMD 75K OHM 1% 1/16W 0402" R0402 37.5,25.5 r270 bottom (schematic designator R33)
R47 "RES SMD 75K OHM 1% 1/16W 0402" R0402 37.5,27.5 r270 bottom (schematic designator R32)
R48 "RES SMD 75K OHM 1% 1/16W 0402" R0402 37.443,17.415 r270 bottom (schematic designator R37)
R49 "RES SMD 75K OHM 1% 1/16W 0402" R0402 37.443,19.415 r270 bottom (schematic designator R36)
R50 "RES SMD 75K OHM 1% 1/16W 0402" R0402 37.5,8.472 r270 bottom (schematic designator R35)
R51 "RES SMD 75K OHM 1% 1/16W 0402" R0402 37.5,10.512 r270 bottom (schematic designator R34)
R52 "RES SMD 0 OHM JUMPER 1/16W 0402" R0402 16.3,15 r270 bottom (schematic designator R12)
R53 "RES SMD 0 OHM JUMPER 1/16W 0402" R0402 12.061,22.083 r270 bottom (schematic designator R14)
R54 "RES SMD 0 OHM JUMPER 1/16W 0402" R0402 12.9,18.2 r180 bottom (schematic designator R10)
R55 "RES SMD 0 OHM JUMPER 1/16W 0402" R0402 17.3,15 r270 bottom (schematic designator R13)
R56 "RES SMD 0 OHM JUMPER 1/16W 0402" R0402 12.9,17.1 r180 bottom (schematic designator R11)
RST "Test Point Pad" Testpoint#1 8.5,31.3 r90 bottom (schematic designator TP17)
TP9 "Test Point Pad" Testpoint#1 17.3,13.2 r90 bottom (schematic designator TP8)
TP12 "Test Point Pad" Testpoint#1 8.469,28.236 r90 bottom
TP13 "Test Point Pad" Testpoint#1 8.49,29.737 r90 bottom
U "Test Point Pad" Testpoint#1 35,13.4 r90 bottom (schematic designator TP1)
U1 "STSPIN32F0A" VFQFPN-48_7x7x1mm_STM 19.2,21.9 r0 top
U2 "TPD3F303DPVR" DPV8_1P7X0P4 9.2,25.7 r270 bottom (schematic designator U1)
V "Test Point Pad" Testpoint#3 35.55,21.5 r90 bottom (schematic designator TP3)
VM "Test Point Pad" Testpoint#1 36,3 r90 top (schematic designator TP20)
VREG "Test Point Pad" Testpoint#1 9.598,20.183 r90 bottom (schematic designator TP14)
W "Test Point Pad" Testpoint#4 35.45,30 r90 bottom (schematic designator TP4)
X1 "SWD" TC2030-IDC-NL 20.9,32.6 r180 top

## Footprints (in the part's own frame and the unit in brackets; to place one, negate y for a bottom-side part, rotate by r counter-clockwise, add the part's x,y. Pads: shape width x height; smd on the part's side, far side on the other; paste and mask are expansions set on the pad)
C0402 [mm]
  rrect35% 0.5x0.55 smd: 1(-0.5,0) 2(0.5,0)
  silkscreen extent -1,-0.5 1,0.5, body extent -0.53,-0.28 0.52,0.27, height 0.55
C0603 [mm]
  rrect35% 0.8x0.991 smd: 1(-0.85,0) 2(0.85,0)
  silkscreen extent -1.52,-0.75 1.52,0.75, body extent -0.88,-0.48 0.87,0.47, height 0.87
C0805 [mm]
  rrect15% 1.15x1.45 smd: 1(-0.9,0) 2(0.9,0)
  silkscreen extent -1.78,-0.94 1.77,0.94, body extent -1.1,-0.72 1.1,0.73, height 0.88
C1206 [mm]
  rect 1.15x1.8 smd: 1(-1.5,0) 2(1.5,0)
  silkscreen extent -2.51,-1.3 2.51,1.27, body extent -1.7,-0.89 1.7,0.91, height 1.75
DIO_STPS1L60ZF [mm]
  rect 1.34x1.8 smd: 1(-1.43,0) 2(1.43,0)
  silkscreen extent -2.8,-0.86 0.44,0.86, body extent -1.75,-0.8 1.75,0.8, height 1.2
DPV8_1P7X0P4 [mm]
  rect 0.38x0.3 smd paste+0 mask+0.05: 1(-0.61,0.75) 2(-0.61,0.25) 3(-0.61,-0.25) 4(-0.61,-0.75) 5(0.61,-0.75) 6(0.61,-0.25) 7(0.61,0.25) 8(0.61,0.75)
  rect 0.4x0.4 smd paste-0.837 mask+0.05: 9(0,0)
  1-SIG-TOP region: -0.2,0.85 0.2,0.85 0.2,-0.85 -0.2,-0.85
  silkscreen extent -1.15,-1.2 0.8,1.2, body extent -0.8,-1.05 0.8,1.05, height 0.65
Fiducial [mm]
  round 1.5 smd paste+0 mask+0.75: ""(0,0)
  round 1.5 smd far side paste+0 mask+0.75: ""(0,0)
  1-SIG-TOP pour cut-out: 0,1.6 0.158,1.6 0.467,1.538 0.758,1.418 1.02,1.243 1.243,1.02 1.418,0.758 1.538,0.467 1.6,0.158 1.6,0 1.6,0 1.6,-0.158 1.538,-0.467 1.418,-0.758 1.243,-1.02 1.02,-1.243 0.758,-1.418 0.467,-1.539 0.158,-1.6 0,-1.6 -0.158,-1.6 -0.467,-1.538 -0.758,-1.418 -1.02,-1.243 -1.243,-1.02 -1.418,-0.758 -1.538,-0.467 -1.6,-0.158 -1.6,0 -1.6,0.158 -1.538,0.467 -1.418,0.758 -1.243,1.02 -1.02,1.243 -0.758,1.418 -0.467,1.538 -0.158,1.6 0,1.6
  4-SIG-BOT pour cut-out: 0,1.6 0.158,1.6 0.467,1.538 0.758,1.418 1.02,1.243 1.243,1.02 1.418,0.758 1.538,0.467 1.6,0.158 1.6,0 1.6,-0.158 1.538,-0.467 1.418,-0.758 1.243,-1.02 1.02,-1.243 0.758,-1.418 0.467,-1.539 0.158,-1.6 0,-1.6 -0.158,-1.6 -0.467,-1.538 -0.758,-1.418 -1.02,-1.243 -1.243,-1.02 -1.418,-0.758 -1.538,-0.467 -1.6,-0.158 -1.6,0 -1.6,0.158 -1.538,0.467 -1.418,0.758 -1.243,1.02 -1.02,1.243 -0.758,1.418 -0.467,1.538 -0.158,1.6 0,1.6
  body extent -1.49,-1.5 1.5,1.5
JST_S4B-ZR-SM4A-TF(LF)(SN) [mm]
  rect 0.7x2.5 smd: 1(-2.25,1.8) 2(-0.75,1.8) 3(0.75,1.8) 4(2.25,1.8)
  rect 1.1x1.9 smd: S1(-4.2,-1.8) S2(4.2,-1.8)
  silkscreen extent -4.5,-3.75 4.5,3.9, body extent -4.44,-3.63 4.55,2.87, height 3.7
JST_S5B-ZR-SM4A-TF(LF)(SN) [mm]
  rect 0.7x2.5 smd: 1(-2.25,1.8) 2(-0.75,1.8) 3(0.75,1.8) 4(2.25,1.8) 5(3.75,1.8)
  rect 1.1x1.9 smd: S1(-4.2,-1.8) S2(5.7,-1.8)
  silkscreen extent -4.5,-3.75 5.98,3.9, body extent -4.49,-3.71 6.01,2.79, height 3.7
LOGO_ACME_CPU [mm]
Logo_ESD [mm]
  silkscreen extent -3.34,-2.24 3.61,3.67
MountHole_M2 [mm] "Mount Hole M2"
  round 4 hole 2.2 paste-2 mask-2: 1(0,0)
"Net Tie 6x30mil" [mil]
  rect 16x6 smd paste-5 mask-5: 1(-7,0) 2(7,0)
POWERFLAT-5x6 [mm]
  rect 0.94x0.62 smd: 1D-A(2.655,-1.905) 1D-B(2.655,-0.635) 1G(-2.655,-1.905) 1S(-2.655,-0.635) 2D-A(2.655,0.635) 2D-B(2.655,1.905) 2G(-2.655,0.635) 2S(-2.655,1.905)
  1-SIG-TOP region: 2.207,-2.202 3.132,-2.202 3.132,-1.597 2.667,-1.597 2.667,-0.937 3.132,-0.937 3.132,-0.327 -0.243,-0.327 -1.193,-0.327 -1.193,-2.202 -1.043,-2.202 -1.043,-2.672 -0.243,-2.672 -0.243,-2.202 1.407,-2.202 1.407,-2.672 2.207,-2.672
  1-SIG-TOP region: 2.207,2.205 3.132,2.205 3.132,1.6 2.667,1.6 2.667,0.94 3.132,0.94 3.132,0.33 -0.243,0.33 -1.193,0.33 -1.193,2.205 -1.043,2.205 -1.043,2.675 -0.243,2.675 -0.243,2.205 1.407,2.205 1.407,2.675 2.207,2.675
  silkscreen extent -3.95,-2.6 3.08,2.6, body extent -3.07,-2.6 3.08,2.6, height 1
R0402 [mm]
  rrect35% 0.5x0.55 smd: 1(-0.5,0) 2(0.5,0)
  silkscreen extent -1,-0.51 1,0.5, body extent -0.53,-0.25 0.53,0.25, height 0.71
R0603 [mm]
  rrect35% 0.8x0.991 smd: 1(-0.85,0) 2(0.85,0)
  silkscreen extent -1.5,-0.75 1.5,0.75, body extent -0.8,-0.41 0.8,0.41, height 0.71
R2512 [mm]
  rrect10% 1.65x3.68 smd: 1(-2.9,0) 2(2.9,0)
  silkscreen extent -1.27,-1.78 1.27,1.78, body extent -3.15,-1.6 3.15,1.6, height 0.71
SOD523 [mm]
  rect 0.7x0.5 smd: 1(0.7,0) 2(-0.7,0)
  silkscreen extent -0.64,-0.51 1.54,0.51, body extent -0.8,-0.4 0.8,0.4, height 0.65
SODFL2512X100N [mm]
  rect 1.05x0.6 smd: 1(-1.4,0) 2(1.4,0)
  silkscreen extent -1.75,-0.47 0.32,0.86, body extent -1.25,-0.63 1.25,0.63, height 0.7
SOT363_SOP65P210X265-6N [mm]
  rrect30% 0.66x0.3 smd mask+0.05: 1(-0.92,0.65) 2(-0.92,0) 3(-0.92,-0.65) 4(0.92,-0.65) 5(0.92,0) 6(0.92,0.65)
  silkscreen extent -1.1,-1.1 0.2,1.35, body extent -1.1,-1.1 1.1,1.1, height 1.1
ST_QFN_1610 [mm]
  rect 0.55x0.8 smd: 1(-0.65,0) 2(0.65,0)
  silkscreen extent -0.95,0.75 -0.85,0.85, body extent -0.85,-0.55 0.85,0.55, height 0.6
TC2030-IDC-NL [mil]
  round 39 hole 39 unplated paste-20: 0(-100,0) 0(100,-40) 0(100,40)
  round 31 smd paste-16: 1(-50,-25) 2(-50,25) 3(0,-25) 4(0,25) 5(50,-25) 6(50,25)
  1-SIG-TOP pour cut-out: -50,25 50,25 50,-25 -50,-25
  1-SIG-TOP keep-out region: -44,-16.01 44,-16.01 44,15.99 -44,15.99
  silkscreen extent -79,-50 69,50
Testpoint#1 [mm]
  round 1 smd paste-0.508 mask-0.025: 1(0,0)
  body extent -0.5,-0.5 0.5,0.5
Testpoint#2 [mm]
  round 1 smd paste-0.508 mask-0.025: 1(0,0.1)
  body extent -0.5,-0.5 0.5,0.5
Testpoint#3 [mm]
  round 1 smd paste-0.508 mask-0.025: 1(0,-0.55)
  body extent -0.5,-0.5 0.5,0.5
Testpoint#4 [mm]
  round 1 smd paste-0.508 mask-0.025: 1(0,-0.45)
  body extent -0.5,-0.5 0.5,0.5
VFQFPN-48_7x7x1mm_STM [mil]
  rect 32x10 smd paste+0 mask+0: 1(-137,108.27) 2(-137,88.58) 3(-137,68.9) 4(-137,49.21) 5(-137,29.53) 6(-137,9.84) 7(-137,-9.84) 8(-137,-29.53) 9(-137,-49.21) 10(-137,-68.9) 11(-137,-88.58) 12(-137,-108.27) 25(137,-108.27) 26(137,-88.58) 27(137,-68.9) 28(137,-49.21) 29(137,-29.53) 30(137,-9.84) 31(137,9.84) 32(137,29.53) 33(137,49.21) 34(137,68.9) 35(137,88.58) 36(137,108.27)
  rect 10x32 smd paste+0 mask+0: 13(-108.27,-137) 14(-88.58,-137) 15(-68.9,-137) 16(-49.21,-137) 17(-29.53,-137) 18(-9.84,-137) 19(9.84,-137) 20(29.53,-137) 21(49.21,-137) 22(68.9,-137) 23(88.58,-137) 24(108.27,-137) 37(108.27,137) 38(88.58,137) 39(68.9,137) 40(49.21,137) 41(29.53,137) 42(9.84,137) 43(-9.84,137) 44(-29.53,137) 45(-49.21,137) 46(-68.9,137) 47(-88.58,137) 48(-108.27,137)
  rect 207x207 smd paste-103 mask+0: 49(0,0)
  silkscreen extent -173,-173 175,173, body extent -141,-141 141,141, height 39
WCAP-ASLI_D8H10.5 [mm] "Aluminium Electrolytic V-Chip SMT Capacitors, 8x10.5mm"
  rect 4.2x1.9 smd: 1(3.5,0) 2(-3.5,0)
  silkscreen extent -4.25,-4.25 4.25,4.25, body extent -4.5,-4.15 4.5,4.15, height 10.5
WCAP-ASLL_D6.3H7.7 [mm] "Aluminium Electrolytic V-Chip SMT Capacitors, 6.3x7.7mm"
  rect 3.5x1.6 smd: 1(2.8,0) 2(-2.8,0)
  silkscreen extent -3.4,-3.4 3.4,3.4, body extent -3.65,-3.3 3.65,3.3, height 7.7
WE-LQS_3015 [mm] "SMD Power Inductor, 2-Leads, body 3x3mm"
  rect 1x2.7 smd: 1(-1.2,0) 2(1.2,0)
  silkscreen extent -0.4,-1.6 0.4,1.6, body extent -1.5,-1.5 1.5,1.5, height 1.5

## Part data
2 FID1 FID2: library part Fiducial, "Fiducial mark.  There is nothing to buy or mount.", ClassName=PCB_FEATURE, CompType=Fiducial, Manufacturer=N/A, Manufacturer Part Number=N/A, MountType=N/A, PackageReference=Fiducial
3V31 3V32 CTRL GND GND1 GND2 INT NTC PA3 PA4 PA5 RST TP9 TP12 TP13 U V VM VREG W: "Test Point. There is nothing to buy or mount.", Manufacturer=N/A, ClassName=TestPoint, CompType=TestPoint, MountType=N/A, PackageReference=TetsPoint, PartNumber=N/A
C1 C2 C3: library part "CAP CER 220nF 100V X7R 0805", "220nF ±10% 100V Ceramic Capacitor X7R 0805 (2012 Metric)", Capacitance=220nF, Case Code (Imperial)=0805, Case Code (Metric)=2012, Dielectric=X7R, Manufacturer=KEMET, Manufacturer Part Number=C0805C224K1RECAUTO, Max Operating Temperature=125°C, Min Operating Temperature=-55°C, Package Quantity=1, Supplier Part Number 1=399-17890-1-ND, Tolerance=10%, Voltage Rating=100V, Case/Package=0805, ComponentLink1Description=https://www.digikey.in/product-detail/en/kemet/C0805C224K1RECAUTO/399-17890-2-ND/8640484, ComponentLink1URL=https://content.kemet.com/datasheets/KEM_C1090_X7R_ESD.pdf, Composition=Ceramic, Depth=1.25mm, Height=1.25mm, Length=2mm, Mount="Surface Mount", Number of Pins=2, Packaging="Tape and Reel", Pricing 1="1=0.45, 10=0.312, 100=0.1875, 500=0.1406, 1000=0.1187 (USD)", Radiation Hardening=No, REACH SVHC=Unknown, Stock 1=1006805, Supplier 1=Digi-Key, Termination=SMD/SMT, Thickness=0.053inch, Voltage Rating (DC)=100V, Width=0.049inch
C4 C5 C6: "100pF ±5% 50V Ceramic Capacitor C0G, NP0 0402 (1005 Metric)", Capacitance=*DNP*, Case Code (Imperial)=0402, Case Code (Metric)=1005, Dielectric=C0G, Dielectric Material=Ceramic, Insulation Resistance=100GR, Manufacturer=Yageo, Manufacturer Part Number=CC0402JRNPO9BN101, Max Operating Temperature=125°C, Min Operating Temperature=-55°C, Package Quantity=1, Supplier Part Number 1=311-1024-1-ND, Temperature Coefficient=30ppm/°C, Tolerance=5%, Voltage=50V, Case/Package=0402, ComponentLink1Description=http://www.farnell.com/datasheets/2213336.pdf?src-supplier=Newark, ComponentLink1URL=http://www.farnell.com/datasheets/2213336.pdf?src-supplier=Newark, ComponentLink2Description=http://www.yageo.com/documents/recent/UPY-GP_NP0_16V-to-50V_16.pdf?src-supplier=Digi-Key, ComponentLink2URL=http://www.yageo.com/documents/recent/UPY-GP_NP0_16V-to-50V_16.pdf?src-supplier=Digi-Key, ComponentLink3Description=http://documents.rs-components.com/techlib://itc_doclist_GB.htm?stockno=6698684&src-supplier=RSComponents, ComponentLink3URL=http://documents.rs-components.com/techlib://itc_doclist_GB.htm?stockno=6698684&src-supplier=RSComponents, ComponentLink4Description=http://www.yageo.com/documents/recent/UPY-GP_NP0_16V-to-50V_8.pdf?src-supplier=Avnet+Europe, ComponentLink4URL=http://www.yageo.com/documents/recent/UPY-GP_NP0_16V-to-50V_8.pdf?src-supplier=Avnet+Europe, ComponentLink5Description=http://www.farnell.com/datasheets/1443161.pdf?src-supplier=Element14, ComponentLink5URL=http://www.farnell.com/datasheets/1443161.pdf?src-supplier=Element14, ComponentLink6Description=http://www.farnell.com/datasheets/2213336.pdf?src-supplier=Element14, ComponentLink6URL=http://www.farnell.com/datasheets/2213336.pdf?src-supplier=Element14, Composition=Ceramic, Depth=0.5mm, Height=0.5mm, Lead Free="Lead Free", Length=1mm, Mount="Surface Mount", Number of Pins=2, Packaging="Tape and Reel", Pricing 1="1=0.1, 10=0.02, 100=0.0089, 500=0.0064, 1000=0.005, 2500=0.0046, 5000=0.0042 (USD)", Radiation Hardening=No, REACH SVHC="No SVHC", Stock 1=4235236, Supplier 1=Digi-Key, Termination=SMD/SMT, Thickness=0.022inch, Voltage Rating=50V, Voltage Rating (DC)=50V, Width=0.5mm
C7: "10µF ±10% 25V Ceramic Capacitor X7R 1206 (3216 Metric)", Capacitance=10uF, Case Code (Imperial)=1206, Case Code (Metric)=3216, Dielectric=X7R, Manufacturer=Yageo, Manufacturer Part Number=CC1206KKX7R8BB106, Max Operating Temperature=125°C, Min Operating Temperature=-55°C, Supplier Part Number 1=311-1959-1-ND, Tolerance=10%, Voltage Rating=25V, Case/Package=1206, ComponentLink1Description=http://www.yageo.com/documents/recent/UPY-GPHC_X7R_6.3V-to-50V_8.pdf?src-supplier=Avnet, ComponentLink1URL=http://www.yageo.com/documents/recent/UPY-GPHC_X7R_6.3V-to-50V_8.pdf?src-supplier=Avnet, ComponentLink2Description=http://www.mouser.com/ds/2/447/Yageo_UPY-GP_NP0_16V-to-50V_9-358835.pdf?src-supplier=Mouser, ComponentLink2URL=http://www.mouser.com/ds/2/447/Yageo_UPY-GP_NP0_16V-to-50V_9-358835.pdf?src-supplier=Mouser, ComponentLink3Description=http://components.arrow.com/part/dataview/0323_04166677?src-supplier=Arrow+Europe, ComponentLink3URL=http://components.arrow.com/part/dataview/0323_04166677?src-supplier=Arrow+Europe, ComponentLink4Description=http://www.yageo.com/documents/recent/UPY-GPHC_X7R_6.3V-to-50V_18.pdf?src-supplier=Digi-Key, ComponentLink4URL=http://www.yageo.com/documents/recent/UPY-GPHC_X7R_6.3V-to-50V_18.pdf?src-supplier=Digi-Key, ComponentLink5Description=http://www.yageo.com/documents/recent/UPY-GPHC_X7R_6.3V-to-50V_9.pdf?src-supplier=Future+Electronics, ComponentLink5URL=http://www.yageo.com/documents/recent/UPY-GPHC_X7R_6.3V-to-50V_9.pdf?src-supplier=Future+Electronics, Composition=Ceramic, Depth=1.6mm, Halogen Free="Halogen Free", Lead Free="Lead Free", Length=3.2mm, Mount="Surface Mount", Packaging="Tape and Reel", Pricing 1="1=0.49, 10=0.348, 50=0.2632, 100=0.2293, 500=0.1698, 1000=0.1444 (USD)", Radiation Hardening=No, Stock 1=3990, Supplier 1=Digi-Key, Termination=SMD/SMT, Thickness=0.071inch, Voltage Rating (DC)=25V, Weight=0.000571oz, Width=1.6mm
C8 C14 C15 C17 C18 C19 C20: "0.1µF ±10% 50V Ceramic Capacitor X7R 0402 (1005 Metric)", Capacitance=100nF, Case Code (Imperial)=0402, Case Code (Metric)=1005, Dielectric=X7R, Manufacturer=TDK, Manufacturer Part Number=CGA2B3X7R1H104K050BB, Max Operating Temperature=125°C, Min Operating Temperature=-55°C, Package Quantity=1, Ratings=AEC-Q200, Supplier Part Number 1=445-6899-1-ND, Tolerance=10%, Voltage=50V, Case/Package=0402, ComponentLink1Description=http://product.tdk.com/capacitor/mlcc/en/documents/mlccspec_automotive_general_midvoltage_en.pdf?src-supplier=Future+Electronics, ComponentLink1URL=http://product.tdk.com/capacitor/mlcc/en/documents/mlccspec_automotive_general_midvoltage_en.pdf?src-supplier=Future+Electronics, ComponentLink2Description=http://www.farnell.com/datasheets/1807242.pdf?src-supplier=Element14, ComponentLink2URL=http://www.farnell.com/datasheets/1807242.pdf?src-supplier=Element14, ComponentLink3Description=http://www.mouser.com/ds/2/400/lcc_automotive_general_en-843974.pdf?src-supplier=Mouser, ComponentLink3URL=http://www.mouser.com/ds/2/400/lcc_automotive_general_en-843974.pdf?src-supplier=Mouser, ComponentLink4Description=http://www.farnell.com/datasheets/1936565.pdf?src-supplier=Element14, ComponentLink4URL=http://www.farnell.com/datasheets/1936565.pdf?src-supplier=Element14, ComponentLink5Description=http://www.farnell.com/datasheets/1735392.pdf?src-supplier=Element14, ComponentLink5URL=http://www.farnell.com/datasheets/1735392.pdf?src-supplier=Element14, Composition=Ceramic, Depth=0.5mm, Height=0.5mm, Lead Free="Lead Free", Length=1mm, Mount="Surface Mount", Packaging="Tape and Reel", Pricing 1="1=0.17, 10=0.118, 50=0.0668, 100=0.0553, 500=0.0388, 1000=0.0321, 2500=0.0299, 5000=0.0273 (USD)", REACH SVHC="No SVHC", Stock 1=2925303, Supplier 1=Digi-Key, Termination=SMD/SMT, Thickness=0.022inch, Voltage Rating=50V, Voltage Rating (DC)=50V, Weight=2.3E-05oz, Width=0.02inch
C9: library part "CAP CER 0.047UF 50V X7R 0402", "4.7nF ±10% 50V Ceramic Capacitor X7R 0402 (1005 Metric)", Capacitance=4.7nF, Case Code (Imperial)=0402, Case Code (Metric)=1005, Dielectric=X7R, Manufacturer=KEMET, Manufacturer Part Number=C0402C472K5RECAUTO, Max Operating Temperature=125°C, Min Operating Temperature=-55°C, Package Quantity=1, Ratings=AEC-Q200, Supplier Part Number 1=399-C0402C472K5RECAUTOCT-ND, Tolerance=10%, Voltage Rating=50V, Case/Package=0402, Composition=Ceramic, Datasheet=https://content.kemet.com/datasheets/KEM_C1090_X7R_ESD.pdf, Depth=0.5mm, Height=0.5mm, Lead Free="Lead Free", Length=1mm, Mount="Surface Mount", Packaging="Tape and Reel", Pricing 1="1=0.11, 10=0.083, 50=0.045, 100=0.0368, 500=0.0263, 1000=0.0207, 2500=0.0188, 5000=0.0173 (USD)", Radiation Hardening=No, REACH SVHC="No SVHC", Stock 1=1255429, Supplier 1=Digi-Key, Termination=SMD/SMT, Thickness=0.022inch, Voltage Rating (DC)=50V, Weight=2.3E-05oz, Width=0.02inch
C10: library part "CAP CER 4.7UF 16V X5R 0603", "47µF ±20% 6.3V Ceramic Capacitor X5R 0603 (1608 Metric)", Capacitance=47uF, Case Code (Imperial)=0603, Case Code (Metric)=1608, Dielectric=X5R, Manufacturer="AVX Corporation", Manufacturer Part Number=06036D476MAT2A, Max Operating Temperature=85°C, Min Operating Temperature=-55°C, Supplier Part Number 1=478-11180-1-ND, Tolerance=20%, Voltage Rating=6.3V, Case/Package=0603, ComponentLink1Description=http://www.mouser.com/ds/2/447/UPY-GPHC_X5R_4V-to-50V_25-1131599.pdf?src-supplier=Mouser, ComponentLink1URL=http://www.mouser.com/ds/2/447/UPY-GPHC_X5R_4V-to-50V_25-1131599.pdf?src-supplier=Mouser, ComponentLink2Description=http://www.yageo.com/documents/recent/UPY-GPHC_X5R_4V-to-50V_25.pdf?src-supplier=Digi-Key, ComponentLink2URL=http://www.yageo.com/documents/recent/UPY-GPHC_X5R_4V-to-50V_25.pdf?src-supplier=Digi-Key, ComponentLink3Description=http://components.arrow.com/part/dataview/0323_04166500?src-supplier=Arrow+Europe, ComponentLink3URL=http://components.arrow.com/part/dataview/0323_04166500?src-supplier=Arrow+Europe, Composition=Ceramic, Depth=0.8mm, Halogen Free="Halogen Free", Height=0.8mm, Lead Free="Lead Free", Length=1.6mm, Mount="Surface Mount", Packaging="Tape and Reel", Pricing 1="1=0.5, 10=0.355, 50=0.2688, 100=0.2341 (USD)", Stock 1=332229, Supplier 1=Digi-Key, Termination=SMD/SMT, Thickness=0.037inch, Voltage Rating (DC)=6.3V, Weight=7.1E-05oz, Width=0.8mm
C11: library part 865060745003, "WCAP-ASLL Aluminum Electrolytic Capacitor, V-Chip, SMT, D6.3xH7.7mm, 22uF, 63V", Capacitance=22uF, Capacitance Tolerance=+/-20%, Leakage Current=13.86uA, Manufacturer="Wurth Elektronik", Operating Temperature="-55 to +105degC", Rated Voltage=63VDC, Ripple Current=120mA, Supplier Part Number 1=48AC8368, ComponentLink1Description=Manufacturer, ComponentLink1URL=http://www.we-online.de, ComponentLink2Description=Datasheet, ComponentLink2URL=https://www.we-online.com/catalog/datasheet/865060745003.pdf, Diameter=6.3mm, Dissipation Factor=10%, Endurance=2000h, Height=7.7mm, Manufacturer Part Number=865060745003, Mounting Technology=SMT, Packaging="Tape and Reel", Published Date="October 2020", Supplier 1=Newark, Technical Reference=ASED077220M063DVCTCB000
C12: "1000pF ±10% 50V Ceramic Capacitor X7R 0402 (1005 Metric)", Capacitance=1nF, Case/Package=0402, Dielectric=X7R, Dielectric Material=Ceramic, Manufacturer=TDK-Lambda, Manufacturer Part Number=C0402C102K5RACTU, Supplier Part Number 1=399-1032-6-ND, Tolerance=10%, Voltage Rating (DC)=50V, ComponentLink1Description=http://www.onlinecomponents.com/productFiles/mf-KEM/kem_c1002_x7r_smd.pdf?src-supplier=Onlinecomponents.com, ComponentLink1URL=http://www.onlinecomponents.com/productFiles/mf-KEM/kem_c1002_x7r_smd.pdf?src-supplier=Onlinecomponents.com, Height=500um, Length=1mm, Mount="Surface Mount", Number of Pins=2, Packaging="Cut Tape", Pricing 1="1=0.1, 10=0.021, 50=0.0116, 100=0.0095, 500=0.0068, 1000=0.0053, 2500=0.0048, 5000=0.0045 (USD)", REACH SVHC="No SVHC", Stock 1=1578852, Supplier 1=Digi-Key, Width=500um
C13: library part "CAP CER 22UF 10V X5R 0805", "220nF ±10% 100V Ceramic Capacitor X7R 0805 (2012 Metric)", Capacitance=220nF, Case Code (Imperial)=0805, Case Code (Metric)=2012, Dielectric=X7R, Manufacturer=KEMET, Manufacturer Part Number=C0805C224K1RECAUTO, Max Operating Temperature=85°C, Min Operating Temperature=-55°C, Package Quantity=1, Supplier Part Number 1=399-17890-1-ND, Tolerance=10%, Voltage Rating=100V, Case/Package=0805, Composition=Ceramic, Datasheet=https://content.kemet.com/datasheets/KEM_C1090_X7R_ESD.pdf, Depth=1.25mm, Height=1.25mm, Length=2mm, Mount="Surface Mount", Number of Pins=2, Packaging="Tape and Reel", Pricing 1="1=0.45, 10=0.312, 100=0.1875, 500=0.1406, 1000=0.1187 (USD)", Radiation Hardening=No, REACH SVHC=Unknown, Stock 1=1006805, Supplier 1=Digi-Key, Termination=SMD/SMT, Thickness=0.053inch, Voltage Rating (DC)=100V, Width=0.049inch
C16: "0.1µF ±10% 50V Ceramic Capacitor X7R 0402 (1005 Metric)", Capacitance=3.3nF, Case Code (Imperial)=0402, Case Code (Metric)=1005, Dielectric=X7R, Manufacturer=KEMET, Manufacturer Part Number=C0402C332K5RECAUTO, Max Operating Temperature=125°C, Min Operating Temperature=-55°C, Package Quantity=1, Ratings=AEC-Q200, Supplier Part Number 1=399-C0402C332K5RECAUTOCT-ND, Tolerance=10%, Voltage=50V, Case/Package=0402, Composition=Ceramic, Datasheet=https://content.kemet.com/datasheets/KEM_C1090_X7R_ESD.pdf, Depth=0.5mm, Height=0.5mm, Lead Free="Lead Free", Length=1mm, Mount="Surface Mount", Packaging="Tape and Reel", Pricing 1="1=0.17, 10=0.118, 50=0.0668, 100=0.0553, 500=0.0388, 1000=0.0321, 2500=0.0299, 5000=0.0273 (USD)", REACH SVHC="No SVHC", Stock 1=2925303, Supplier 1=Digi-Key, Termination=SMD/SMT, Thickness=0.022inch, Voltage Rating=50V, Voltage Rating (DC)=50V, Weight=2.3E-05oz, Width=0.02inch
C21 C22: "220µF 35V Aluminum Electrolytic Capacitors Radial, Can - SMD  2000 Hrs @ 105°C", Capacitance=220uF, Capacitance Tolerance=+/-20%, Leakage Current=77uA, Manufacturer="Wurth Elektronik", Manufacturer Part Number=865080553014, Operating Temperature="-55 to +105degC", Rated Voltage=35V, Ripple Current=570mA, Supplier Part Number 1=732-8513-1-ND, ComponentLink1Description=Manufacturer, ComponentLink1URL=http://www.we-online.de, ComponentLink2Description=Datasheet, ComponentLink2URL=https://www.we-online.com/catalog/datasheet/865080553014.pdf, Diameter=8mm, Dissipation Factor=14%, Endurance=2000h, Height=10mm, Mount="Surface Mount", Mounting Technology=SMT, Packaging="Tape and Reel", Published Date="Nov 2014", Supplier 1=Digi-Key
C23: "1µF ±10% 6.3V Ceramic Capacitor X5R 0402 (1005 Metric)", Capacitance=1uF, Case Code (Imperial)=0402, Case Code (Metric)=1005, Dielectric=X5R, Dielectric Material=Ceramic, Manufacturer=Yageo, Manufacturer Part Number=CC0402KRX5R5BB105, Max Operating Temperature=85°C, Min Operating Temperature=-55°C, Package Quantity=1, Supplier Part Number 1=311-1438-1-ND, Tolerance=10%, Voltage Rating=6.3V, Case/Package=0402, ComponentLink1Description=http://www.farnell.com/datasheets/70765.pdf?src-supplier=Farnell, ComponentLink1URL=http://www.farnell.com/datasheets/70765.pdf?src-supplier=Farnell, ComponentLink2Description=http://www.yageo.com/documents/recent/UPY-GPHC_X5R_4V-to-50V_25.pdf?src-supplier=Digi-Key, ComponentLink2URL=http://www.yageo.com/documents/recent/UPY-GPHC_X5R_4V-to-50V_25.pdf?src-supplier=Digi-Key, ComponentLink3Description=http://www.farnell.com/datasheets/2167237.pdf?src-supplier=Element14, ComponentLink3URL=http://www.farnell.com/datasheets/2167237.pdf?src-supplier=Element14, ComponentLink4Description=http://www.yageo.com/documents/recent/UPY-GPHC_X5R_4V-to-50V_12.pdf?src-supplier=Avnet+Europe, ComponentLink4URL=http://www.yageo.com/documents/recent/UPY-GPHC_X5R_4V-to-50V_12.pdf?src-supplier=Avnet+Europe, ComponentLink5Description=http://www.farnell.com/datasheets/1359354.pdf?src-supplier=Element14, ComponentLink5URL=http://www.farnell.com/datasheets/1359354.pdf?src-supplier=Element14, ComponentLink6Description=http://www.farnell.com/datasheets/70765.pdf?src-supplier=Element14, ComponentLink6URL=http://www.farnell.com/datasheets/70765.pdf?src-supplier=Element14, ComponentLink7Description=http://www.yageo.com/documents/recent/UPY-GPHC_X5R_4V-to-50V_12.pdf?src-supplier=Avnet, ComponentLink7URL=http://www.yageo.com/documents/recent/UPY-GPHC_X5R_4V-to-50V_12.pdf?src-supplier=Avnet, Composition=Ceramic, Depth=0.5mm, Halogen Free="Halogen Free", Height=0.5mm, Lead Free="Lead Free", Length=1mm, Mount="Surface Mount", Number of Pins=2, Packaging="Tape and Reel", Pricing 1="1=0.1, 10=0.05, 50=0.0272, 100=0.0222, 500=0.0158, 1000=0.0124, 2500=0.0113, 5000=0.0104 (USD)", Radiation Hardening=No, REACH SVHC="No SVHC", Stock 1=34926286, Supplier 1=Digi-Key, Termination=SMD/SMT, Thickness=0.022inch, Voltage Rating (DC)=6.3V, Width=0.02inch
D1 D2 D3 D4 D5 D6: library part "DIODE GEN PURP 75V 300mA", "Diode Gen Purpose 75V 300mA Surface Mount SOD-323", Average Rectified Current=150mA, Forward Current=300mA, Forward Voltage=1V, Manufacturer="SMC Diode Solutions", Max Operating Temperature=100°C, Max Repetitive Reverse Voltage (Vrrm)=75V, Max Reverse Leakage Current=2.5uA, Max Surge Current=2.0A, Min Operating Temperature=-65°C, Package Quantity=1, Supplier Part Number 1=1655-1359-1-ND, ComponentLink1Description=https://www.digikey.in/product-detail/en/smc-diode-solutions/1N4148WSTR/1655-1359-2-ND/6022449, ComponentLink1URL=http://www.smc-diodes.com/propdf/1N4148WS%20N0572%20REV.B.pdf, Element Configuration=Single, Lead Free="Lead Free", Manufacturer Part Number=1N4148WSTR, Max Reverse Voltage (DC)=75V, Mount="Surface Mount", Number of Pins=2, Packaging="Tape and Reel", Peak Non-Repetitive Surge Current=2.0A, Peak Reverse Current=2.5uA, Pricing 1="1=0.48, 10=0.409, 100=0.3057, 500=0.2402, 1000=0.1856, 2500=0.1692, 5000=0.1583 (USD)", Radiation Hardening=No, Stock 1=3984, Supplier 1=Digi-Key
D7: "Schottky Diode 30V 300mA (DC) Surface Mount SOD-523", Manufacturer=STMicroelectronics, Package=SOD-523, Supplier Part Number 1=497-5552-1-ND, ComponentLink1Description=Datasheet, ComponentLink1URL=http://www.farnell.com/datasheets/2307448.pdf, Manufacturer Part Number=BAT30KFILM, Supplier 1=Digi-Key
D8: "Diode Schottky 60V 1A Surface Mount SOD-123F", Manufacturer=STMicroelectronics, Package=SOD-123F, Supplier Part Number 1=497-17154-1-ND, Datasheet=https://www.st.com/content/ccc/resource/technical/document/datasheet/group1/7e/b6/29/85/66/15/45/f3/CD00002285/files/CD00002285.pdf/jcr:content/translations/en.CD00002285.pdf, Manufacturer Part Number=STPS1L60ZF, Supplier 1=Digi-Key
D9: library part "TVS DIODE 5V 12.5V 5CH SC88", "12.5V Clamp 8A (8/20µs) Ipp Tvs Diode Surface Mount SC-88/SC70-6/SOT-363", Breakdown Voltage=6.2V, Capacitance=130pF, Case/Package=SC, Clamping Voltage=12.5V, Leakage Current=5uA, Manufacturer="ON Semiconductor", Max Breakdown Voltage=7.2V, Max Operating Temperature=125°C, Max Output Current=8A, Max Power Dissipation=100W, Min Operating Temperature=-40°C, Package Quantity=1, Power Line Protection=No, Reverse Standoff Voltage=5V, Supplier Part Number 1=SMF05CT1GOSCT-ND, Test Current=1mA, ComponentLink1Description=http://www.farnell.com/datasheets/1708354.pdf?src-supplier=Element14, ComponentLink1URL=http://www.farnell.com/datasheets/1708354.pdf?src-supplier=Element14, ComponentLink2Description=http://www.onsemi.com/pub/Collateral/SMF05C-D.PDF?src-supplier=Digi-Key, ComponentLink2URL=http://www.onsemi.com/pub/Collateral/SMF05C-D.PDF?src-supplier=Digi-Key, ComponentLink3Description=http://www.mouser.com/ds/2/308/SMF05C-D-100912.pdf?src-supplier=Mouser, ComponentLink3URL=http://www.mouser.com/ds/2/308/SMF05C-D-100912.pdf?src-supplier=Mouser, ComponentLink4Description=http://www.onsemi.com/pub/Collateral/SMF05C-D.PDF?src-supplier=Avnet, ComponentLink4URL=http://www.onsemi.com/pub/Collateral/SMF05C-D.PDF?src-supplier=Avnet, ComponentLink5Description=https://www.verical.com/server-webapp/html/getDatasheet?partID=98371&src-supplier=Verical, ComponentLink5URL=https://www.verical.com/server-webapp/html/getDatasheet?partID=98371&src-supplier=Verical, Composition=Zener, Contact Plating=Tin,Matte, Depth=1.25mm, Direction=Unidirectional, Element Configuration="Common Anode", ESD Protection=Yes, Height=1mm, Lead Free="Lead Free", Length=2mm, Manufacturer Part Number=SMF05CT1G, Max Reverse Leakage Current=5uA, Max Surge Current=8A, Min Breakdown Voltage=6.2V, Mount="Surface Mount", Number of Channels=5, Number of Elements=5, Number of Pins=6, Number of Unidirectional Channels=5, Packaging="Tape and Reel", Peak Pulse Current=8A, Peak Pulse Power=100W, Polarity=Unidirectional, Power Dissipation=100W, Pricing 1="1=0.41, 10=0.307, 25=0.2768, 100=0.1459, 250=0.1444, 500=0.1293, 1000=0.1006 (USD)", Radiation Hardening=No, REACH SVHC="No SVHC", Reverse Breakdown Voltage=6.2V, Stock 1=33811, Supplier 1=Digi-Key, Termination=SMD/SMT, Voltage Rating (DC)=5V, Width=1.25mm, Working Voltage=5V
D10 D11: library part "TVS DIODE ESDA7P120-1U1M 5.5V 11.5V 1610", "11.5V Clamp 120A (8/20µs) Ipp Tvs Diode Surface Mount 1610", Case Code (Imperial)=0603, Case Code (Metric)=1610, Clamping Voltage=11.5V, Manufacturer=STMicroelectronics, Max Operating Temperature=150°C, Min Breakdown Voltage=6.4V, Min Operating Temperature=-55°C, Peak Pulse Current=120A, Peak Pulse Power=1.4kW, Power Line Protection=No, Reverse Standoff Voltage=5.5V, Supplier Part Number 1=497-17159-1-ND, Case/Package=0603, ComponentLink1Description=http://www.st.com/content/ccc/resource/technical/document/datasheet/group3/5e/7c/5d/76/3f/de/45/35/DM00359316/files/DM00359316.pdf/jcr:content/translations/en.DM00359316.pdf?src-supplier=Digi-Key, ComponentLink1URL=http://www.st.com/content/ccc/resource/technical/document/datasheet/group3/5e/7c/5d/76/3f/de/45/35/DM00359316/files/DM00359316.pdf/jcr:content/translations/en.DM00359316.pdf?src-supplier=Digi-Key, ComponentLink2Description=http://www.farnell.com/datasheets/2815837.pdf?src-supplier=Newark, ComponentLink2URL=http://www.farnell.com/datasheets/2815837.pdf?src-supplier=Newark, ComponentLink3Description=http://www.farnell.com/datasheets/2815837.pdf?src-supplier=Farnell, ComponentLink3URL=http://www.farnell.com/datasheets/2815837.pdf?src-supplier=Farnell, ComponentLink4Description=http://www.farnell.com/datasheets/2815837.pdf?src-supplier=Element14, ComponentLink4URL=http://www.farnell.com/datasheets/2815837.pdf?src-supplier=Element14, Composition=Zener, Manufacturer Part Number=ESDA7P120-1U1M, Mount="Surface Mount", Number of Unidirectional Channels=1, Packaging="Cut Tape", Pricing 1="1=0.35, 10=0.287, 25=0.2624, 100=0.1647, 250=0.1629, 500=0.1525, 1000=0.1037, 2500=0.0994 (USD)", Stock 1=15775, Supplier 1=Digi-Key
L1: library part 74404032220, "WE-LQS SMT Power Inductor, size 3015, 22uH, 0.6A", DC Resistance=450mOhm, Inductance=22uH, Manufacturer="Wurth Elektronik", Operating Temperature="-40 to +125degC", Rated Current=0.6A, Self Resonant Frequency=19MHz, Supplier Part Number 1=732-5499-1-ND, ComponentLink1Description=Manufacturer, ComponentLink1URL=http://www.we-online.de, ComponentLink2Description=Datasheet, ComponentLink2URL=https://www.we-online.com/catalog/datasheet/74404032220.pdf, Manufacturer Part Number=74404032220, Mounting Technology=SMT, Packaging="Tape and Reel", Published Date="March 2020", Saturation Current=0.6A, Size=3015, Supplier 1=Digi-Key
MNT1 MNT2 MNT3 MNT4: library part MountHole_M2, "PCB Mount Hole. There is nothing to buy or mount."
NT1 NT2 NT3 NT4 NT5 NT6 NT7 NT8 NT9 NT10 NT11: library part "Net Tie Line", ClassName=STM32G473CETx